# Altium PCB PGBoard.PcbDoc
Units mil, origin at the board's own origin, x right, y up, seen from the top; angles counter-clockwise.
Board outline 7700 x 3850 mil, 2 copper layers (Top Layer, Bottom Layer); 81 components, 98 nets, 395 pads, 21 vias.
Unrouted connection lines stored in the file: 75.
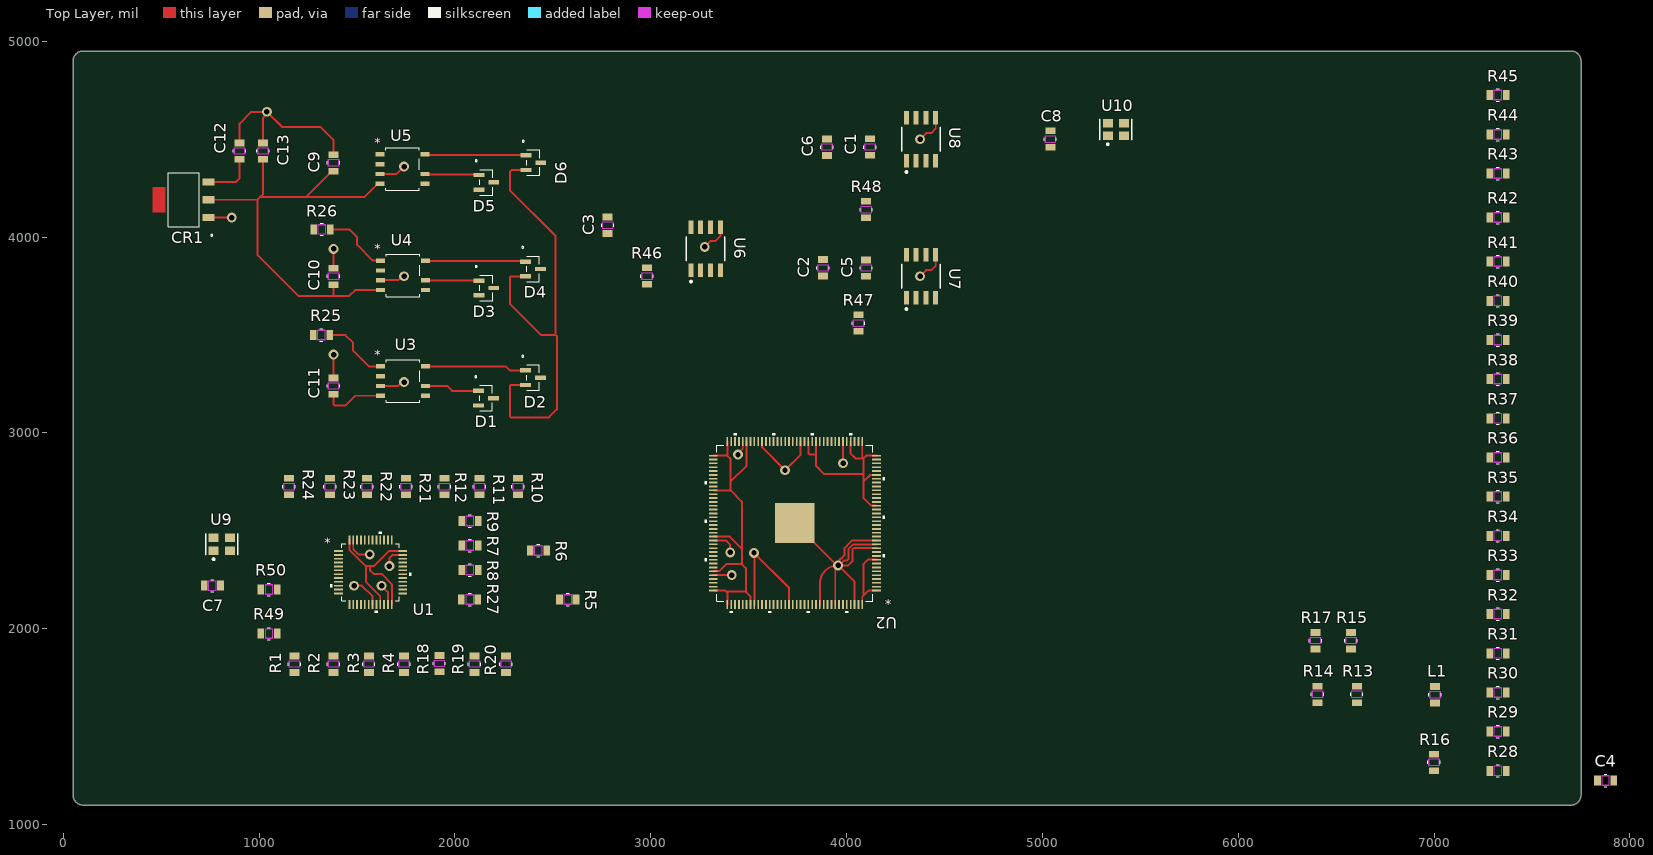
[diagram p0: Top Layer view]
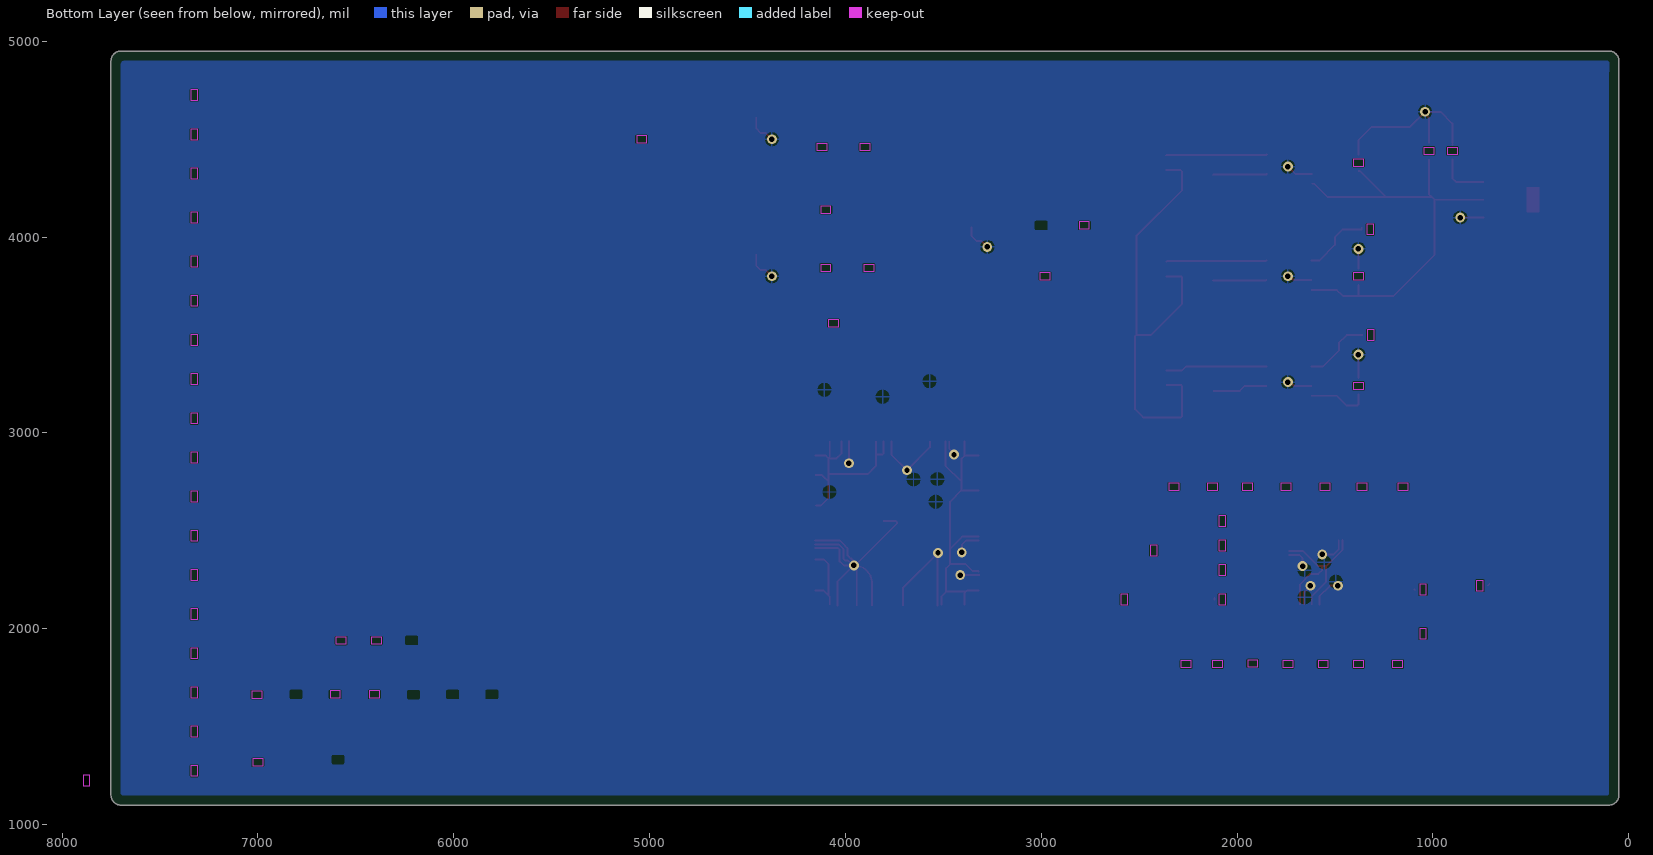
[diagram p1: Bottom Layer view, seen from below]

## Layer stack, top to bottom
Top Solder: solder mask 0.4, Solder Resist, Dk 3.5
Top Layer: signal copper 1.4
Dielectric 1: dielectric 12.6, FR-4, Dk 4.8
Bottom Layer: signal copper 1.4
Bottom Solder: solder mask 0.4, Solder Resist, Dk 3.5

## Board outline
100,1100 cw(c100,1150) 50,1150 50,4900 cw(c100,4900) 100,4950 7700,4950 cw(c7700,4900) 7750,4900 7750,1150 cw(c7700,1150) 7700,1100

## Design rules (kind name [scope] priority, off if disabled: settings)
Clearance [All] p1: gap=5 ignorepadtopadclearanceinfootprint=FALSE
PolygonConnect [All] p1: connectstyle=Relief reliefconductorwidth=10 reliefentries=4 polygonreliefangle="90 Angle" airgapwidth=10
RoutingVias [All] p1: holewidth=28 width=50 viastyle="Through Hole" minholewidth=28 minwidth=50 maxholewidth=28 maxwidth=50
SolderMaskExpansion [All] p1: expansion=4 istentingtop=FALSE
UnpouredPolygon [All] p1: allowunpoured=TRUE
Width [All] p1: maxlimit=10 minlimit=10 preferedwidth=10
29 further rules are at their usual default settings.

## Components (designator, comment, footprint, x,y, rotation, side; value= is the part's Value field where it differs from the comment)
C1 "0.1u" RESISTOR1 4120,4460 r90 top
C2 "0.1u" RESISTOR1 3880,3842.5 r90 top
C3 "0.1u" RESISTOR1 2780,4060 r90 top
C4 "4.7n" Resistor1 7875,1225 r0 top
C5 "4.7n" RESISTOR1 4100,3842.5 r270 top
C6 "4.7n" RESISTOR1 3900,4460 r270 top
C7 "0.01u" RESISTOR1 760,2220 r0 top
C8 "0.01u" RESISTOR1 5040,4500 r90 top
C9 "0.1u" RESISTOR1 1380,4380 r270 top
C10 "0.1u" RESISTOR1 1380,3800 r270 top
C11 "0.1u" RESISTOR1 1380,3240 r270 top
C12 "0.1u" RESISTOR1 900,4440 r270 top
C13 "10u" RESISTOR1 1020,4440 r270 top
CR1 "VoltageReg" VOLTAGEREG1 615,4191 r90 top
D1 "Diode" DIODE1 2158,3177.5 r270 top
D2 "Diode" DIODE1 2398,3282.5 r270 top
D3 "Diode" DIODE1 2160,3740 r270 top
D4 "Diode" DIODE1 2398,3837.5 r270 top
D5 "Diode" DIODE1 2160,4280 r270 top
D6 "Diode" DIODE1 2400,4380 r270 top
L1 "Ferrite Bead" Resistor1 7005,1664 r270 top
R1 "22" RESISTOR1 1180,1820 r270 top
R2 "22" RESISTOR1 1380,1820 r270 top
R3 "22" RESISTOR1 1560,1820 r270 top
R4 "22" RESISTOR1 1740,1820 r270 top
R5 "22" RESISTOR1 2575,2150 r0 top
R6 "22" RESISTOR1 2425,2400 r0 top
R7 "22" RESISTOR1 2075,2425 r0 top
R8 "22" RESISTOR1 2075,2300 r0 top
R9 "22" RESISTOR1 2075,2550 r0 top
R10 "22" RESISTOR1 2322.56,2725.49 r90 top
R11 "22" RESISTOR1 2124.46,2725.49 r90 top
R12 "22" RESISTOR1 1945.93,2725.49 r90 top
R13 "22" RESISTOR1 6605,1665 r270 top
R14 "22" RESISTOR1 6405,1665 r270 top
R15 "22" RESISTOR1 6575,1940 r270 top
R16 "22" RESISTOR1 7000,1318 r270 top
R17 "22" RESISTOR1 6395,1940 r270 top
R18 "22" RESISTOR1 1920,1823 r270 top
R19 "22" RESISTOR1 2100,1820 r270 top
R20 "22" RESISTOR1 2260,1820 r270 top
R21 "22" RESISTOR1 1749.07,2725.66 r90 top
R22 "22" RESISTOR1 1550.79,2725.49 r90 top
R23 "22" RESISTOR1 1361.48,2725.45 r90 top
R24 "22" RESISTOR1 1152.47,2725.45 r90 top
R25 "22" RESISTOR1 1317,3500 r0 top
R26 "22" RESISTOR1 1320,4040 r0 top
R27 "22" RESISTOR1 2075,2150 r180 top
R28 "330" RESISTOR1 7325,1275 r0 top
R29 "330" RESISTOR1 7325,1475 r0 top
R30 "330" RESISTOR1 7325,1675 r0 top
R31 "330" RESISTOR1 7325,1875 r0 top
R32 "330" RESISTOR1 7325,2075 r0 top
R33 "330" RESISTOR1 7325,2275 r0 top
R34 "330" RESISTOR1 7325,2475 r0 top
R35 "330" RESISTOR1 7325,2675 r0 top
R36 "330" RESISTOR1 7325,2875 r0 top
R37 "330" RESISTOR1 7325,3075 r0 top
R38 "330" RESISTOR1 7325,3275 r0 top
R39 "330" RESISTOR1 7325,3475 r0 top
R40 "330" RESISTOR1 7325,3675 r0 top
R41 "330" RESISTOR1 7325,3875 r0 top
R42 "330" RESISTOR1 7325,4100 r0 top
R43 "330" RESISTOR1 7325,4325 r0 top
R44 "330" RESISTOR1 7325,4525 r0 top
R45 "330" RESISTOR1 7325,4725 r0 top
R46 "100k" RESISTOR1 2980,3800 r90 top
R47 "100k" RESISTOR1 4060,3560 r90 top
R48 "100k" RESISTOR1 4100,4140 r90 top
R49 "4.7k" RESISTOR1 1050,1975 r0 top
R50 "4.7k" RESISTOR1 1050,2200 r0 top
U1 "MCU" MCU2 1569.25,2288.91 r0 top
U2 "FPGA" FPGA2 3735.24,2539.76 r180 top
U3 "ZeroCross" ZEROCROSS1 1735,3265 r0 top
U4 "ZeroCross" ZEROCROSS1 1735,3805 r0 top
U5 "ZeroCross" ZEROCROSS1 1732.91,4347.56 r0 top
U6 "Current Sign" CURRENTSIGN4 3280,3940 r90 top
U7 "Current Sign" CURRENTSIGN4 4380,3800 r90 top
U8 "Current Sign" CURRENTSIGN4 4380,4500 r90 top
U9 "Oscillator" OSCILLATOR 808.66,2431.48 r0 top
U10 "Oscillator" OSCILLATOR 5375,4550 r0 top

## Footprints (in the part's own frame and the unit in brackets; to place one, negate y for a bottom-side part, rotate by r counter-clockwise, add the part's x,y. Pads: shape width x height; smd on the part's side, far side on the other; paste and mask are expansions set on the pad)
CURRENTSIGN4 [mm]
  rect 1.75x0.65 smd paste+0 mask+0: 1(-2.8,1.905) 2(-2.8,0.635) 3(-2.8,-0.635) 4(-2.8,-1.905) 5(2.8,-1.905) 6(2.8,-0.635) 7(2.8,0.635) 8(2.8,1.905)
  silkscreen extent -4.37,-2.5 1.55,2.5, body extent -3.77,-2.6 3.77,2.6, height 0.25
DIODE1 [mil]
  rect 22x56 smd paste+0 mask+0: 1(-37.5,-38) 2(37.5,-38) 3(0,38)
  silkscreen extent -115,-57 65,32, body extent -60,-52 60,52, height 44
FPGA2 [mil]
  rect 45.5x9 smd paste+0 mask+0: 1(-416.25,344.49) 2(-416.25,324.8) 3(-416.25,305.12) 4(-416.25,285.43) 5(-416.25,265.75) 6(-416.25,246.06) 7(-416.25,226.38) 8(-416.25,206.69) 9(-416.25,187.01) 10(-416.25,167.32) 11(-416.25,147.64) 12(-416.25,127.95) 13(-416.25,108.27) 14(-416.25,88.58) 15(-416.25,68.9) 16(-416.25,49.21) 17(-416.25,29.53) 18(-416.25,9.84) 19(-416.25,-9.84) 20(-416.25,-29.53) 21(-416.25,-49.21) 22(-416.25,-68.9) 23(-416.25,-88.58) 24(-416.25,-108.27) 25(-416.25,-127.95) 26(-416.25,-147.64) 27(-416.25,-167.32) 28(-416.25,-187.01) 29(-416.25,-206.69) 30(-416.25,-226.38) 31(-416.25,-246.06) 32(-416.25,-265.75) 33(-416.25,-285.43) 34(-416.25,-305.12) 35(-416.25,-324.8) 36(-416.25,-344.49) 73(416.25,-344.49) 74(416.25,-324.8) 75(416.25,-305.12) 76(416.25,-285.43) 77(416.25,-265.75) 78(416.25,-246.06) 79(416.25,-226.38) 80(416.25,-206.69) 81(416.25,-187.01) 82(416.25,-167.32) 83(416.25,-147.64) 84(416.25,-127.95) 85(416.25,-108.27) 86(416.25,-88.58) 87(416.25,-68.9) 88(416.25,-49.21) 89(416.25,-29.53) 90(416.25,-9.84) 91(416.25,9.84) 92(416.25,29.53) 93(416.25,49.21) 94(416.25,68.9) 95(416.25,88.58) 96(416.25,108.27) 97(416.25,127.95) 98(416.25,147.64) 99(416.25,167.32) 100(416.25,187.01) 101(416.25,206.69) 102(416.25,226.38) 103(416.25,246.06) 104(416.25,265.75) 105(416.25,285.43) 106(416.25,305.12) 107(416.25,324.8) 108(416.25,344.49)
  rect 9x45.5 smd paste+0 mask+0: 37(-344.49,-416.25) 38(-324.8,-416.25) 39(-305.12,-416.25) 40(-285.43,-416.25) 41(-265.75,-416.25) 42(-246.06,-416.25) 43(-226.38,-416.25) 44(-206.69,-416.25) 45(-187.01,-416.25) 46(-167.32,-416.25) 47(-147.64,-416.25) 48(-127.95,-416.25) 49(-108.27,-416.25) 50(-88.58,-416.25) 51(-68.9,-416.25) 52(-49.21,-416.25) 53(-29.53,-416.25) 54(-9.84,-416.25) 55(9.84,-416.25) 56(29.53,-416.25) 57(49.21,-416.25) 58(68.9,-416.25) 59(88.58,-416.25) 60(108.27,-416.25) 61(127.95,-416.25) 62(147.64,-416.25) 63(167.32,-416.25) 64(187.01,-416.25) 65(206.69,-416.25) 66(226.38,-416.25) 67(246.06,-416.25) 68(265.75,-416.25) 69(285.43,-416.25) 70(305.12,-416.25) 71(324.8,-416.25) 72(344.49,-416.25) 109(344.49,416.25) 110(324.8,416.25) 111(305.12,416.25) 112(285.43,416.25) 113(265.75,416.25) 114(246.06,416.25) 115(226.38,416.25) 116(206.69,416.25) 117(187.01,416.25) 118(167.32,416.25) 119(147.64,416.25) 120(127.95,416.25) 121(108.27,416.25) 122(88.58,416.25) 123(68.9,416.25) 124(49.21,416.25) 125(29.53,416.25) 126(9.84,416.25) 127(-9.84,416.25) 128(-29.53,416.25) 129(-49.21,416.25) 130(-68.9,416.25) 131(-88.58,416.25) 132(-108.27,416.25) 133(-127.95,416.25) 134(-147.64,416.25) 135(-167.32,416.25) 136(-187.01,416.25) 137(-206.69,416.25) 138(-226.38,416.25) 139(-246.06,416.25) 140(-265.75,416.25) 141(-285.43,416.25) 142(-305.12,416.25) 143(-324.8,416.25) 144(-344.49,416.25)
  rect 203x203 smd paste-101 mask+0: EPAD(0,0)
  silkscreen extent -459,-459 459,459, body extent 0,0 10,10, height 10
MCU2 [mil]
  rect 45.5x9 smd paste+0 mask+0: 1(-164.25,108.3) 2(-164.25,88.61) 3(-164.25,68.91) 4(-164.25,49.22) 5(-164.25,29.53) 6(-164.25,9.85) 7(-164.25,-9.84) 8(-164.25,-29.53) 9(-164.25,-49.22) 10(-164.25,-68.91) 11(-164.25,-88.61) 12(-164.25,-108.3) 25(164.25,-108.3) 26(164.25,-88.61) 27(164.25,-68.91) 28(164.25,-49.22) 29(164.25,-29.53) 30(164.25,-9.84) 31(164.25,9.85) 32(164.25,29.53) 33(164.25,49.22) 34(164.25,68.91) 35(164.25,88.61) 36(164.25,108.3)
  rect 9x45.5 smd paste+0 mask+0: 13(-108.29,-164.25) 14(-88.6,-164.25) 15(-68.91,-164.25) 16(-49.22,-164.25) 17(-29.53,-164.25) 18(-9.84,-164.25) 19(9.85,-164.25) 20(29.54,-164.25) 21(49.23,-164.25) 22(68.92,-164.25) 23(88.61,-164.25) 24(108.3,-164.25) 37(108.3,164.25) 38(88.61,164.25) 39(68.92,164.25) 40(49.23,164.25) 41(29.54,164.25) 42(9.85,164.25) 43(-9.84,164.25) 44(-29.53,164.25) 45(-49.22,164.25) 46(-68.91,164.25) 47(-88.6,164.25) 48(-108.29,164.25)
  silkscreen extent -207,-207 207,207, body extent -181,-181 181,181, height 63
OSCILLATOR [mm]
  rect 1.3x1.1 smd paste+0 mask+0: 1(-1.05,-0.825) 2(1.05,-0.825) 3(1.05,0.825) 4(-1.05,0.825)
  silkscreen extent -2.08,-2.05 2.07,1.35, body extent -1.8,-1.48 1.8,1.48, height 0.25
RESISTOR1 [mil]
  rect 34x51 smd paste+0 mask+0: 1(-41,0) 2(43,0)
  Top Layer keep-out region: -17.5,-24.5 -17.5,24.5 17.5,24.5 17.5,-24.5
  Keep-Out Layer region: -17.5,-26.5 -17.5,26.5 17.5,26.5 17.5,-26.5
  silkscreen extent -7,-32 7,32, body extent -44,-26 44,26, height 26
Resistor1 [mil]
  rect 34x51 smd paste+0 mask+0: 1(-41,0) 2(43,0)
  Top Layer keep-out region: -17.5,-24.5 -17.5,24.5 17.5,24.5 17.5,-24.5
  Keep-Out Layer region: -17.5,-26.5 -17.5,26.5 17.5,26.5 17.5,-26.5
  silkscreen extent -7,-32 7,32, body extent -44,-26 44,26, height 26
VOLTAGEREG1 [mil]
  rect 36x63 smd paste+0 mask+0: 1(-90.55,-126) 2(0,-126) 3(90.55,-126)
  Top Layer region: 63,94.5 63,157.5 -63,157.5 -63,94.5
  silkscreen extent -187,-148 137,78, body extent -132,-144 132,144, height 71
ZEROCROSS1 [mil]
  rect 46x22 smd paste+0 mask+0: 1(-115,75) 2(-115,25) 3(-115,-25) 4(-115,-75) 5(115,-75) 6(115,-25) 7(115,75)
  silkscreen extent -85,-108 86,108, body extent -124,-104 124,104, height 65

## Part data
C1 C2 C3 C9 C10 C11 C12: library part Capacitor0.1u, "C0805C104K1RAC7800", Mfr_Name=Murata
C4 C5 C6: library part Capacitor4.7n, "C0805C472K1GEC7800", Mfr_Name=Murata
C7 C8: library part Capacitor0.01u, "C0805C103J1GEC7800", Mfr_Name=Murata
C13: library part Capacitor10u, "C0805C104K1RAC7800", Mfr_Name=Murata
CR1: "LD1117S33TR", Mfr_Name=STMicroelectronics, RefDes=RefDes, Type=Type
D1 D2 D3 D4 D5 D6: "BAS19LT1G", Mfr_Name=MCC
L1: "BLM21BB050SN1D", Mfr_Name=TDK
R1 R2 R3 R4 R5 R6 R7 R8 R9 R10 R11 R12 R13 R14 R15 R16 R17 R18 R19 R20 R21 R22 R23 R24 R25 R26 R27: library part Resistor22, "RMCF0603JT22R0", Mfr_Name="Stackpole International"
R28 R29 R30 R31 R32 R33 R34 R35 R36 R37 R38 R39 R40 R41 R42 R43 R44 R45: library part Resistor330, "RMCF0805FT330R", Mfr_Name="Stackpole International"
R46 R47 R48: library part Resistor100k, "RMCF0805FT100K", Mfr_Name="Stackpole International"
R49 R50: library part Resistor4.7k, "RMCF0805FT4K70", Mfr_Name="Stackpole International"
U1: "STM32G491CET6"
U2: "10M04SAE144C8G"
U3 U4 U5: "BM1Z003FJ-E2"
U6 U7 U8: library part CurrentSign, "ACS71240LLCBTR-010B3"
U9 U10: "ASE-48.000MHZ-L-C-T"

## Via types
v1: diameter 50, hole 28, Top Layer to Bottom Layer, 21 vias

## Nets (pads, with @x,y where several pads share a name; then routed paths per layer and width w, separated by ;. In a path a pad name is that pad's centre, name@x,y a point inside that pad or via, vN(x,y) a via of type N, cw(c..) or ccw(c..) an arc to the next point about the centre after c; other vN are vias at no path point)
3.3V: C1.1 C2.1 C3.1 C7.2 C8.1 C9.2 C10.2 C11.2 C13.2 CR1.2 R46.2 R47.2 R48.2 U1.21 U1.24 U1.36 U1.48 U2.1 U2.2 U2.9 U2.23 U2.31 U2.34 U2.35 U2.36 U2.37 U2.40 U2.49 U2.51 U2.67 U2.71 U2.72 U2.73 U2.82 U2.94 U2.103 U2.107 U2.108 U2.109 U2.115 U2.117 U2.143 U2.144 U3.4 U4.4 U5.4 U6.8 U7.8 U8.8 U9.2 U10.2 | length 6923.2
  Top Layer w10: CR1.2 991,4191 ; C13.2 1020,4220 1005.5,4205.5 ; C11.2 1380,3145.86 1385.86,3140 1440,3140 1490,3190 U3.4 ; C10.2 1380,3705.86 1385.86,3700 ; C9.2 1371.5,4337 1240,4205.5 ; U1.48 1460.96,2404.04 1545,2320 ; U5.4 1605.91,4272.56 1538.85,4205.5 1240,4205.5 ; U1.21 1618.48,2166.52 1545,2240 1545,2320 ; U4.4 1490,3730 1460,3700 1385.86,3700 ; U1.24 1677.55,2227.45 1625,2280 1585,2280 1565,2300 1565,2320 ; U1.36 1662.21,2397.21 1585,2320 1565,2320 ; U2.108 3379.38,2195.28 3385.06,2189.59 ; U2.103 3319.49,2294.2 3349.67,2294.2 3385.24,2329.76 3465.24,2329.76 ; U2.94 3404.13,2470.87 3465.24,2409.76 ; U2.82 3407.91,2707.09 ; U2.73 3390.75,2884.25 ; U2.109 3390.75,2183.91 3385.06,2189.59 ; U2.72 3390.75,2884.25 ; U2.67 3489.17,2833.7 3407.91,2752.44 ; U2.115 3508.86,2166.14 3485.24,2189.76 ; U2.51 3804.13,2896.72 3809.99,2890.87 3840.61,2890.87 3843.5,2893.76 ; U2.49 3843.5,2893.76 ; U2.40 4020.67,2894.33 4045.24,2869.76 4085.24,2869.76 ; U2.144 4079.72,2164.25 4085.24,2169.76 ; U2.37 4079.72,2875.28 4085.24,2869.76 ; U2.23@4150.99,2628.85 4126.15,2628.85 4085.24,2669.76 4085.24,2749.76 ; U2.1 4110.75,2195.28 4085.24,2169.76 ; U2.9 4108.23,2352.76 4085.24,2329.76 4085.24,2169.76 ; U2.31 4150.99,2785.33 4120.8,2785.33 4085.24,2749.76 ; U2.36 4099.72,2884.25 4085.24,2869.76 ; 991,4191 991,3909 1200,3700 1385.86,3700 ; 991,4191 1005.5,4205.5 ; 1005.5,4205.5 1240,4205.5 ; 1545,2320 1565,2320 ; 3385.06,2189.59 3385.24,2189.76 3485.24,2189.76 ; 3390.75,2884.25 3407.91,2867.09 3407.91,2752.44 ; 3407.91,2707.09 3465.24,2649.76 3465.24,2409.76 ; 3407.91,2707.09 3407.91,2752.44 ; 3465.24,2329.76 3485.24,2309.76 3485.24,2189.76 ; 3465.24,2329.76 3465.24,2409.76 ; 3843.5,2893.76 3843.5,2831.5 3885.24,2789.76 4085.24,2789.76 ; 4085.24,2749.76 4085.24,2789.76 ; 4085.24,2789.76 4085.24,2869.76
15V: C12.2 CR1.3 | length 263.6
  Top Layer w10: CR1.3 881.55,4281.55 900,4300 C12.2
GND: C1.2 C2.2 C3.2 C4.1 C5.1 C6.1 C7.1 C8.2 C9.1 C10.1 C11.1 C12.1 C13.1 CR1.1 L1.2 U1.19 U1.23 U1.35 U1.47 U2.12 U2.13 U2.14 U2.42 U2.53 U2.63 U2.68 U2.83 U2.95 U2.104 U2.116 U2.125 U2.133 U2.137 U2.142 U2.EPAD U3.3 U4.3 U5.3 U6.5 U7.5 U8.5 U9.4 U10.4 | length 8624.6
  Top Layer w10: C7.1@710,2229 C7.1 ; CR1.1 741.45,4100 v1(860,4100) ; C12.1@900,4471.61 C12.1@900.85,4472.46 ; C12.1 900,4580 960,4640 v1(1040,4640) ; C13.1 1020,4609.18 1040,4629.18 v1(1040,4640) ; C11.1 v1(1380,3400) ; C10.1 v1(1380,3940) ; C9.1@1381,4420 C9.1 1380,4494.14 1310.9,4563.24 1116.76,4563.24 v1(1040,4640) ; U1.47 1480.65,2405.57 1506.21,2380 v1(1565,2380) ; v1(1485,2220) 1525,2220 1579.1,2165.9 U1.19 ; U5.3 1702.56,4322.56 v1(1740,4360) ; U3.3 1709.18,3240 1729.18,3260 v1(1740,3260) ; U4.3 1709.18,3780 1729.18,3800 v1(1740,3800) ; v1(1625,2220) 1657.86,2187.14 U1.23 ; v1(1665,2320) 1665,2360 1682.52,2377.52 U1.35 ; v1(3275,3950) 3306.33,3981.33 3331.33,3981.33 3355,4005 U6.5 ; U2.104@3314.99,2274.02 U2.104 v1(3413.39,2274.02) ; U2.95 3383.82,2451.18 3405.24,2429.76 v1(3405.24,2389.76) ; v1(3445.24,2889.76) 3445.24,2894.01 3469.49,2918.26 U2.68 ; v1(3526.97,2387.6) v1@3528.54,2386.02 ; U2.116@3528.54,2119.51 U2.116 v1@3528.54,2386.02 ; U2.63 3568.41,2955.51 3568.41,2926.59 v1(3685.24,2809.76) 3764.76,2889.29 U2.53 ; U2.125@3705.71,2119.51 U2.125 3705.71,2208.86 v1@3528.54,2386.02 ; U2.EPAD@3804.53,2550 3745.47,2550 ccw(c3745.47,2539.76) U2.EPAD v1@3948.04,2326.96 ; U2.133@3863.19,2119.51 U2.133 3863.19,2230.71 ; U2.137@3941.93,2119.51 U2.137 v1@3941.93,2309.45 ; U2.42@3981.3,2960.01 U2.42 3981.3,2845.67 v1(3981.69,2845.28) ; U2.142@4040.35,2119.51 U2.142 4040.35,2239.37 v1(3956.1,2323.62) ; U2.12@4155.49,2411.81 U2.12 4037.4,2411.81 4028.94,2403.35 4028.94,2344.24 4008.32,2323.62 v1@3961.49,2323.62 ; U2.13@4155.49,2431.5 U2.13 4033.46,2431.5 4010.24,2408.27 4010.24,2357.09 4002.36,2349.21 3987.08,2349.21 v1@3961.49,2323.62 ; U2.14@4155.49,2451.18 U2.14 4027.56,2451.18 4002.36,2425.98 4002.36,2425 3988.58,2411.22 3988.58,2374.8 3971.85,2358.07 3968.9,2358.07 3963.76,2352.93 3963.76,2331.28 v1(3956.1,2323.62) ; v1(4375,3800) 4406.33,3831.33 4431.33,3831.33 4455,3855 U7.5 ; v1(4375,4500) 4406.33,4531.33 4431.33,4531.33 4455,4555 U8.5 ; 3863.19,2230.71 cw(c3956.1,2230.71) v1(3956.1,2323.62) ; 3863.19,2230.71 cw(c3956.1,2230.71) v1(3956.1,2323.62) ; 3863.19,2230.71 cw(c3956.1,2230.71) v1(3956.1,2323.62) ; 3863.19,2230.71 cw(c3956.1,2230.71) v1(3956.1,2323.62) ; 3863.19,2230.71 cw(c3956.1,2230.71) v1(3956.1,2323.62) ; 3863.19,2230.71 cw(c3956.1,2230.71) v1(3956.1,2323.62) ; 3863.19,2230.71 cw(c3956.1,2230.71) v1(3956.1,2323.62) ; 3863.19,2230.71 cw(c3956.1,2230.71) v1(3956.1,2323.62) ; 3863.19,2230.71 cw(c3956.1,2230.71) v1(3956.1,2323.62) ; 3863.19,2230.71 cw(c3956.1,2230.71) v1(3956.1,2323.62) ; 3863.19,2230.71 cw(c3956.1,2230.71) v1(3956.1,2323.62) ; 3863.19,2230.71 cw(c3956.1,2230.71) v1(3956.1,2323.62) ; 3863.19,2230.71 cw(c3956.1,2230.71) v1(3956.1,2323.62) ; 3863.19,2230.71 cw(c3956.1,2230.71) v1(3956.1,2323.62) ; 3863.19,2230.71 cw(c3956.1,2230.71) v1(3956.1,2323.62) ; 3863.19,2230.71 cw(c3956.1,2230.71) v1(3956.1,2323.62) ; v1@3941.93,2309.45 cw(c3956.1,2309.45) v1(3956.1,2323.62) ; v1@3941.93,2309.45 cw(c3956.1,2309.45) v1(3956.1,2323.62) ; v1@3941.93,2309.45 cw(c3956.1,2309.45) v1(3956.1,2323.62) ; v1@3941.93,2309.45 cw(c3956.1,2309.45) v1(3956.1,2323.62) ; v1@3941.93,2309.45 cw(c3956.1,2309.45) v1(3956.1,2323.62) ; v1@3941.93,2309.45 cw(c3956.1,2309.45) v1(3956.1,2323.62) ; v1@3941.93,2309.45 cw(c3956.1,2309.45) v1(3956.1,2323.62) ; v1@3941.93,2309.45 cw(c3956.1,2309.45) v1(3956.1,2323.62) ; v1@3941.93,2309.45 cw(c3956.1,2309.45) v1(3956.1,2323.62) ; v1@3941.93,2309.45 cw(c3956.1,2309.45) v1(3956.1,2323.62) ; v1@3941.93,2309.45 cw(c3956.1,2309.45) v1(3956.1,2323.62) ; v1@3941.93,2309.45 cw(c3956.1,2309.45) v1(3956.1,2323.62) ; v1@3941.93,2309.45 cw(c3956.1,2309.45) v1(3956.1,2323.62) ; v1@3941.93,2309.45 cw(c3956.1,2309.45) v1(3956.1,2323.62) ; v1@3941.93,2309.45 cw(c3956.1,2309.45) v1(3956.1,2323.62) ; v1@3941.93,2309.45 cw(c3956.1,2309.45) v1(3956.1,2323.62) ; v1@3948.04,2326.96 ccw(c3956.1,2335.03) v1(3956.1,2323.62) ; v1@3948.04,2326.96 ccw(c3956.1,2335.03) v1(3956.1,2323.62) ; v1@3948.04,2326.96 ccw(c3956.1,2335.03) v1@3948.24,2326.77 ; v1@3948.04,2326.96 ccw(c3956.1,2335.03) v1@3948.24,2326.77 ; v1@3948.04,2326.96 ccw(c3956.1,2335.03) v1@3948.24,2326.77 ; v1@3948.04,2326.96 ccw(c3956.1,2335.03) v1@3948.24,2326.77 ; v1@3948.04,2326.96 ccw(c3956.1,2335.03) v1@3948.24,2326.77 ; v1@3948.04,2326.96 ccw(c3956.1,2335.03) v1@3948.24,2326.77 ; v1@3948.04,2326.96 ccw(c3956.1,2335.03) v1(3956.1,2323.62) ; v1@3948.04,2326.96 ccw(c3956.1,2335.03) v1(3956.1,2323.62) ; v1@3948.04,2326.96 ccw(c3956.1,2335.03) v1@3948.24,2326.77 ; v1@3948.04,2326.96 ccw(c3956.1,2335.03) v1@3948.24,2326.77 ; v1@3948.04,2326.96 ccw(c3956.1,2335.03) v1@3948.24,2326.77 ; v1@3948.04,2326.96 ccw(c3956.1,2335.03) v1@3948.24,2326.77 ; v1@3948.04,2326.96 ccw(c3956.1,2335.03) v1@3948.24,2326.77 ; v1@3948.04,2326.96 ccw(c3956.1,2335.03) v1@3948.24,2326.77 ; v1@3948.24,2326.76 ccw(c3956.1,2335.03) v1(3956.1,2323.62) ; v1@3948.24,2326.76 ccw(c3956.1,2335.03) v1(3956.1,2323.62) ; v1@3948.24,2326.76 ccw(c3956.1,2335.03) v1(3956.1,2323.62) ; v1@3948.24,2326.76 ccw(c3956.1,2335.03) v1(3956.1,2323.62) ; v1@3948.24,2326.76 ccw(c3956.1,2335.03) v1(3956.1,2323.62) ; v1@3948.24,2326.76 ccw(c3956.1,2335.03) v1(3956.1,2323.62) ; v1@3948.24,2326.76 ccw(c3956.1,2335.03) v1(3956.1,2323.62) ; v1@3948.24,2326.76 ccw(c3956.1,2335.03) v1(3956.1,2323.62) ; v1@3948.24,2326.76 ccw(c3956.1,2335.03) v1(3956.1,2323.62) ; v1@3948.24,2326.76 ccw(c3956.1,2335.03) v1(3956.1,2323.62) ; v1@3948.24,2326.76 ccw(c3956.1,2335.03) v1(3956.1,2323.62) ; v1@3948.24,2326.76 ccw(c3956.1,2335.03) v1(3956.1,2323.62) ; v1(3956.1,2323.62) v1@3961.49,2323.62
NetC4_2: C4.2 U2.126 U6.6
NetC5_2: C5.2 U2.85 U7.6
NetC6_2: C6.2 U2.99 U8.6
NetD1_1: D1.1 U3.6 | length 280.4
  Top Layer w10: U3.6 1960,3240 1985,3215 D1.1
NetD1_2: D1.2
NetD2_1: D2.1 U3.7 | length 518.3
  Top Layer w10: U3.7 2260,3340 2280,3320 D2.1
NetD2_2: D2.2 D4.2 D6.2 | length 2410.7
  Top Layer w10: D2.2 2285.86,3245 2280,3239.14 2280,3085.86 2285.86,3080 2480,3080 2520,3120 2520,3494.14 2514.14,3500 ; D4.2 2285.86,3800 2280,3794.14 2280,3660 2440,3500 2514.14,3500 ; D6.2 2288.36,4342.5 2280,4334.14 2280,4240 2514.14,4005.86 2514.14,3500
NetD3_1: D3.1 U4.6 | length 273
  Top Layer w10: U4.6 1851.25,3778.75 2120.75,3778.75 D3.1
NetD3_2: D3.2
NetD4_1: D4.1 U4.7 | length 512.1
  Top Layer w10: U4.7 1852.5,3877.5 2357.5,3877.5 D4.1
NetD5_1: D5.1 U5.6 | length 276.2
  Top Layer w10: U5.6 1850.44,4320.03 2119.47,4320.03 D5.1
NetD5_2: D5.2
NetD6_1: D6.1 U5.7 | length 516.2
  Top Layer w10: U5.7 1850.44,4420.03 2359.47,4420.03 D6.1
NetI1n_1: U6.3 U6.4
NetI1p_1: U6.1 U6.2
NetI2n_1: U7.3 U7.4
NetI2p_1: U7.1 U7.2
NetI3n_1: U8.3 U8.4
NetI3p_1: U8.1 U8.2
NetL1_1: L1.1 U2.4
NetR1: U1.12
NetR1_2: R1.2 U2.79
NetR2: U1.13
NetR2_2: R2.2 U2.44
NetR3: U1.14
NetR3_2: R3.2 U2.43
NetR4: U1.15
NetR4_2: R4.2 U2.41
NetR5: U1.34
NetR5_2: R5.2 U2.26
NetR6: U1.33
NetR6_2: R6.2 U2.32
NetR7: U1.32
NetR7_2: R7.2 U2.33
NetR8: U1.31
NetR8_2: R8.2 U2.38
NetR9: U1.30
NetR9_2: R9.2 U2.39
NetR10: U1.37
NetR10_2: R10.2 U2.29
NetR11: U1.38
NetR11_2: R11.2 U2.28
NetR12: U1.39
NetR12_2: R12.2 U2.27
NetR13: R20.2
NetR13_2: R13.2 U2.11
NetR14: R21.2
NetR14_2: R14.2 U2.10
NetR15: R22.2
NetR15_2: R15.2 U2.136
NetR16: R23.2
NetR16_2: R16.2 U2.135
NetR17: R24.2
NetR17_2: R17.2 U2.141
NetR18: U1.16
NetR18_2: R18.2
NetR19: U1.17
NetR19_2: R19.2
NetR20: U1.18
NetR21: U1.40
NetR22: U1.41
NetR23: U1.42
NetR24: U1.43
NetR25: U1.27
NetR25_2: R25.2 U3.1 | length 349.7
  Top Layer w10: R25.2 1440,3500 1480,3460 1480,3420 1560,3340 U3.1
NetR26: U1.28
NetR26_2: R26.2 U4.1 | length 355.2
  Top Layer w10: R26.2@1363,4048.5 R26.2 1460,4040 1500,4000 1500,3960 1580,3880 U4.1
NetR27: U5.1
NetR27_2: R27.2 U1.29
NetR28: U2.46
NetR29: U2.47
NetR30: U2.50
NetR31: U2.54
NetR32: U2.55
NetR33: U2.56
NetR34: U2.57
NetR35: U2.58
NetR36: U2.59
NetR37: U2.60
NetR38: U2.64
NetR39: U2.65
NetR40: U2.69
NetR41: U2.70
NetR42: U2.74
NetR43: U2.75
NetR44: U2.76
NetR45: U2.77
NetR46: U2.3 U6.7
NetR47: U2.7 U7.7
NetR48: U2.6 U8.7
NetR49_2: R49.2 U1.11
NetR50_2: R50.2 U1.10 | length 4.2
  Top Layer w10: R50.2@1090,2197 R50.2
NetU1_3: U1.3 U9.3
NetU2_129: U2.129 U10.3
VCC: 
pads on no net: D1.3 D2.3 D3.3 D4.3 D5.3 D6.3 R1.1 R2.1 R3.1 R4.1 R5.1 R6.1 R7.1 R8.1 R9.1 R10.1 R11.1 R12.1 R13.1 R14.1 R15.1 R16.1 R17.1 R18.1 R19.1 R20.1 R21.1 R22.1 R23.1 R24.1 R25.1 R26.1 R27.1 R28.1 R28.2 R29.1 R29.2 R30.1 R30.2 R31.1 R31.2 R32.1 R32.2 R33.1 R33.2 R34.1 R34.2 R35.1 R35.2 R36.1 R36.2 R37.1 R37.2 R38.1 R38.2 R39.1 R39.2 R40.1 R40.2 R41.1 R41.2 R42.1 R42.2 R43.1 R43.2 R44.1 R44.2 R45.1 R45.2 R46.1 R47.1 R48.1 R49.1 R50.1 U1.1 U1.2 U1.4 U1.5 U1.6 U1.7 U1.8 U1.9 U1.20 U1.22 U1.25 U1.26 U1.44 U1.45 U1.46 U2.5 U2.8 U2.15 U2.16 U2.17 U2.18 U2.19 U2.20 U2.21 U2.22 U2.24 U2.25 U2.30 U2.45 U2.48 U2.52 U2.61 U2.62 U2.66 U2.78 U2.80 U2.81 U2.84 U2.86 U2.87 U2.88 U2.89 U2.90 U2.91 U2.92 U2.93 U2.96 U2.97 U2.98 U2.100 U2.101 U2.102 U2.105 U2.106 U2.110 U2.111 U2.112 U2.113 U2.114 U2.118 U2.119 U2.120 U2.121 U2.122 U2.123 U2.124 U2.127 U2.128 U2.130 U2.131 U2.132 U2.134 U2.138 U2.139 U2.140 U3.2 U3.5 U4.2 U4.5 U5.2 U5.5 U9.1 U10.1
copper on no net: | length 8.5
  Top Layer w10: 2116,2150 2116,2158.5

## Polygon pours and split planes (outlines as drawn)
GND on Bottom Layer "GND_L02_P000" (solid, pour order 0): 100.55,4845.3 100.55,1159.45 ccw(c110,1159.45) 110,1150 7690,1150 ccw(c7690,1160) 7700,1160 7700,4880 ccw(c7680,4880) 7680,4900 110,4900 ccw(c110,4890) 100,4890 100,4840

## Silkscreen, mask and mechanical layers (free items; w line width, h text height)
Mechanical 1:
  lines w10: 50,1150 ccw(c100,1150) 100,1100 7700,1100 ccw(c7700,1150) 7750,1150 7750,4900 ccw(c7700,4900) 7700,4950 3950,4950 100,4950 ccw(c100,4900) 50,4900 50,1150

## Text inside footprints (layer, text, board x,y; h text height)
U1: Top Overlay "*" at 1331.25,2412.91 h50; Mechanical 13 "*" at 1430.25,2382.05 h50
U2: Top Overlay "*" at 4230.24,2170.76 h50 r180; Mechanical 13 "*" at 4126.24,2210.43 h50 r180
U3: Top Overlay "*" at 1589,3375 h50; Mechanical 13 "*" at 1657,3315.5 h50
U4: Top Overlay "*" at 1589,3915 h50; Mechanical 13 "*" at 1657,3855.5 h50
U5: Top Overlay "*" at 1586.91,4457.56 h50; Mechanical 13 "*" at 1654.91,4398.06 h50